# Altium PCB FLX5.PcbDoc (part 3 of 4)
Units mm, origin at the board's own origin, x right, y up, seen from the top; angles counter-clockwise.
Board outline 45.2 x 54.5 mm, 4 copper layers (Top Layer, gndplane, vplane, Bottom Layer), stack 1.596 mm thick; 151 components, 82 nets, 455 pads, 132 vias.
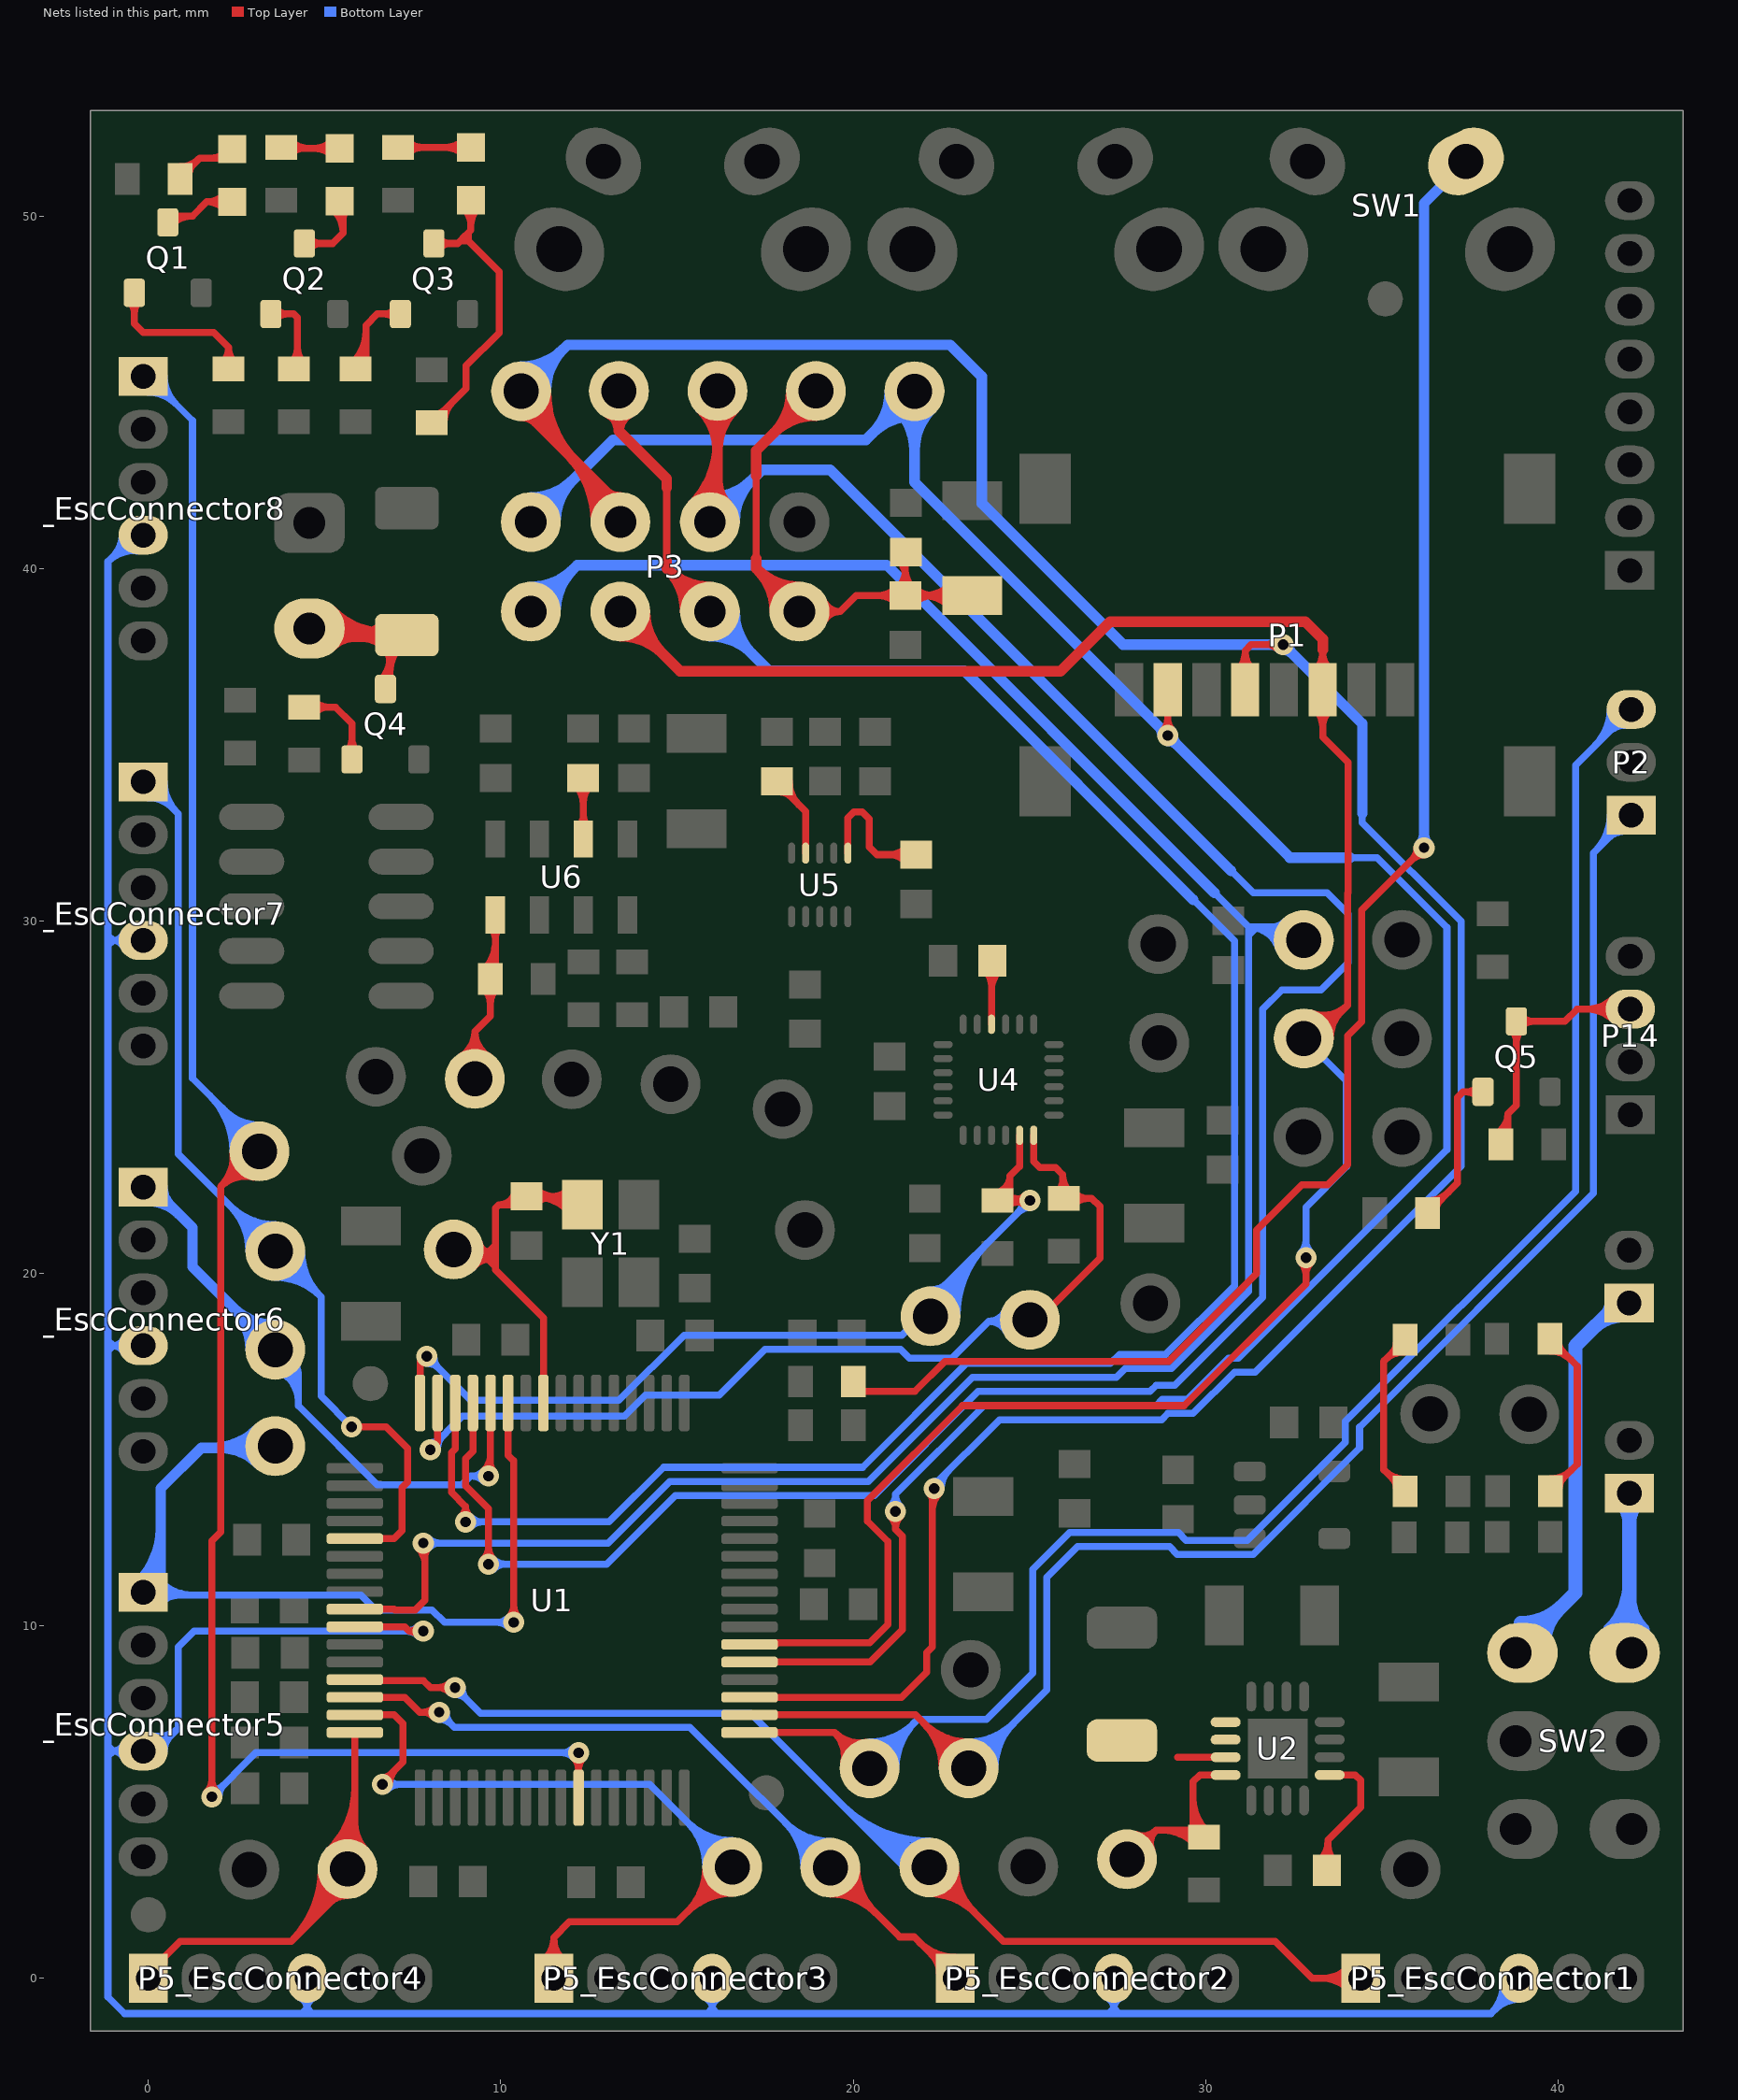
[diagram p5: the nets of this part, all layers, seen from the top]

## Via types
v1: diameter 0.6, hole 0.3, Top Layer to Bottom Layer, 132 vias

## Nets (pads, with @x,y where several pads share a name; then routed paths per layer and width w, separated by ;. In a path a pad name is that pad's centre, name@x,y a point inside that pad or via, vN(x,y) a via of type N, cw(c..) or ccw(c..) an arc to the next point about the centre after c; other vN are vias at no path point) (continued)
NetC18_1: C18.1 OSC1.1 U1.41 Y1.3 | length 16.5
  Top Layer w0.2: 9.6,20.45 9.85,20.2 ; 9.65,20.6 9.85,20.8 ; 10.218,21.948 ccw(c10.218,22.331) C18.1@10.585,22.219 ; C18.1@10.393,22.277 cw(c9.948,22.414) 9.948,21.948 ; C18.1@10.887,22.189 cw(c10.887,20.645) Y1.3@11.98,21.737 ; C18.1@10.992,21.977 cw(c11.505,21.465) 11.505,22.189 cw(c11.505,22.913) C18.1@10.992,22.401 ; U1.41@11.208,16.325 11.208,18.742 9.85,20.1 9.85,20.2 ; 11.37,22.189 cw(c11.37,21.127) Y1.3@12.121,21.878 ; 11.45,22.189 ccw(c11.45,22.938) Y1.3@11.98,22.409 ; Y1.3@12.316,21.948 12.074,22.189 C18.1@10.73,22.189 10.489,21.948 9.948,21.948 ; 9.85,20.2 9.85,20.8 ; 9.85,20.8 9.85,21.85 9.948,21.948
  Top Layer w0.4: OSC1.1@8.6,20.508 9.692,20.508 ; OSC1.1@9.16,20.261 cw(c9.692,19.812) 9.692,20.508 ; OSC1.1@9.297,20.824 ccw(c9.692,20.912) 9.692,20.508
NetC24_1: C24.1 U2.9 | length 5
  Top Layer w0.2: C24.1@33.235,3.326 ccw(c32.645,3.916) 33.479,3.916 ; C24.1@33.479,3.064 33.479,3.929 34.4,4.85 34.4,5.621 34.25,5.771 U2.9@33.521,5.771 ; 33.479,3.76 ccw(c34.093,3.76) C24.1@33.659,3.326
NetC31_2: C31.2 U4.10 | length 2.5
  Top Layer w0.2: C31.2@23.738,28.606 cw(c23.289,28.157) 23.924,28.157 ; U4.10@23.924,27.071 C31.2@23.924,28.463 ; 23.924,28.031 cw(c24.737,28.031) C31.2@24.162,28.606
NetC36_1: C36.1 U5.1 | length 5.1
  Top Layer w0.2: U5.1@19.851,31.925 19.851,32.927 20.024,33.1 20.258,33.1 20.458,32.9 20.458,32.1 20.676,31.882 C36.1@21.783,31.882 ; C36.1@21.521,31.67 ccw(c21.009,31.158) 21.009,31.882 ccw(c21.009,32.606) C36.1@21.521,32.094
NetC37_1: C37.1 U5.4 | length 3.9
  Top Layer w0.2: C37.1@17.833,33.966 17.833,33.925 18.651,33.107 U5.4@18.651,31.925 ; C37.1@17.883,33.666 cw(c17.883,33.162) 18.24,33.518 ; C37.1@17.983,33.966 ccw(c18.445,33.966) C37.1@18.119,33.64 ; C37.1@18.183,33.966 ccw(c19.128,33.966) 18.46,33.298
NetC38_1: C38.1 U6.2 | length 3.5
  Top Layer w0.2: C38.1@12.121,33.847 cw(c11.587,33.313) 12.342,33.313 ; U6.2@12.219,32.696 ccw(c11.92,32.994) 12.342,32.994 ccw(c12.765,32.994) U6.2@12.466,32.696 ; C38.1@12.333,34.059 12.342,34.05 U6.2@12.342,32.322 ; 12.342,33.357 cw(c13.035,33.357) C38.1@12.545,33.847
NetD1_1: D1.1 R8.2 | length 3.2
  Top Layer w0.2: R8.2@0.9,51.4 ccw(c0.9,52.124) 1.412,51.612 ; R8.2@1.05,51.25 1.45,51.65 2.122,51.65 D1.1@2.378,51.906 ; R8.2@1.15,51.15 cw(c1.633,51.15) 1.291,51.491 ; 1.784,51.65 ccw(c1.784,52.224) D1.1@2.29,51.953
NetD1_2: D1.2 Q1.3 | length 4
  Top Layer w0.2: Q1.3@0.55,49.825 0.725,50 1.25,50 1.656,50.406 ; Q1.3@0.691,49.784 cw(c1.214,49.261) 1.214,50 ; Q1.3@0.691,50.066 ccw(c0.852,50.227) 0.852,50 ; D1.2@2.165,50.194 ccw(c1.656,49.687) 1.656,50.406 ; D1.2@2.165,50.618 cw(c1.656,51.125) 1.656,50.406 ; D1.2@2.378,50.406 1.656,50.406
NetD2_1: D2.1 R9.2 | length 3.7
  Top Layer w0.2: R9.2@3.774,51.95 3.799,51.925 D2.1@5.428,51.925 ; R9.2@4.051,51.773 cw(c4.418,51.407) 4.418,51.925 ; R9.2@4.051,52.127 ccw(c4.538,52.614) 4.538,51.925 ; D2.1@5.216,51.713 ccw(c4.704,51.201) 4.704,51.925 ccw(c4.704,52.649) D2.1@5.216,52.137
NetD2_2: D2.2 Q2.3 | length 4.4
  Top Layer w0.2: Q2.3@4.425,49.225 5.227,49.225 5.528,49.526 D2.2@5.528,50.425 ; Q2.3@4.566,49.084 cw(c4.908,48.742) 4.908,49.225 cw(c4.908,49.708) Q2.3@4.566,49.366 ; D2.2@5.226,50.203 cw(c4.605,49.52) 5.528,49.52 ; D2.2@5.361,50.351 cw(c5.016,49.973) 5.528,49.973 ; 5.528,49.942 cw(c5.911,49.942) D2.2@5.64,50.213
NetD3_1: D3.1 R10.2 | length 4.2
  Top Layer w0.2: R10.2@7.081,51.95 D3.1@9.15,51.95 ; R10.2@7.358,51.773 cw(c7.785,51.346) 7.785,51.95 cw(c7.785,52.554) R10.2@7.358,52.127 ; D3.1@8.938,51.738 ccw(c8.426,51.226) 8.426,51.95 ccw(c8.426,52.674) D3.1@8.938,52.162
NetD3_2: D3.2 JP1.1 Q3.3 | length 11.8
  Top Layer w0.2: JP1.1@8.04,44.136 9.016,45.112 9.016,45.753 9.95,46.687 9.95,48.425 9.075,49.3 ; Q3.3@8.1,49.225 8.775,49.225 8.85,49.3 ; JP1.1@8.14,44.386 ccw(c8.14,44.748) 8.396,44.492 ; Q3.3@8.241,49.084 cw(c8.583,48.742) 8.583,49.225 cw(c8.583,49.708) Q3.3@8.241,49.366 ; JP1.1@8.39,44.136 cw(c9.235,44.136) 8.638,44.734 ; D3.2@8.938,50.238 cw(c8.426,49.726) 9.15,49.726 cw(c9.874,49.726) D3.2@9.362,50.238 ; 9.076,49.301 9.076,49.526 ; D3.2@9.15,50.45 9.15,49.6 9.076,49.526 ; 8.85,49.3 8.963,49.413 ; 8.85,49.3 9.075,49.3 ; 8.963,49.413 9.075,49.3 ; 8.963,49.413 9.076,49.526
NetD4_1: D4.1 LS1.2 Q4.3 | length 12.2
  Top Layer w0.2: LS1.2@4.65,38.112 LS1.2@4.657,38.112 ; Q4.3@6.586,36.826 ccw(c5.948,37.464) 6.85,37.464 ; D4.1@6.679,37.759 cw(c6.268,37.347) 6.85,37.347 ; Q4.3@6.727,36.685 ccw(c6.431,36.981) Q4.3@6.85,36.981 ; Q4.3@6.85,36.585 D4.1@6.85,38 ; 6.85,37.024 cw(c8.016,37.024) D4.1@7.234,37.89 ; 6.85,37.475 cw(c7.609,37.475) D4.1@7.1,38.038
  Top Layer w0.4: LS1.2@4.619,38.112 LS1.2@4.65,38.112 ; LS1.2@4.619,38.15 4.657,38.112 D4.1@7.333,38.112 ; LS1.2@4.896,38.477 ccw(c5.777,39.357) 5.777,38.112 ; LS1.2@5.179,37.84 cw(c5.835,37.184) 5.835,38.112 ; LS1.2@5.179,38.76 ccw(c6.742,40.323) D4.1@6.742,38.112 ; D4.1@6.75,37.829 ccw(c6.067,37.146) 6.067,38.112 ccw(c6.067,39.078) D4.1@6.75,38.395
NetDRX_1: DRX.1 P2.3 U1.17 | length 58.6
  Top Layer w0.2: U1.17@17.058,6.975 19.475,6.975 ; DRX.1@19.732,6.111 ccw(c18.805,6.305) 19.475,6.975 ; 19.737,6.713 cw(c19.238,6.214) DRX.1@19.928,6.07 ; 19.749,6.7 ccw(c20.256,7.207) DRX.1@20.375,6.5 ; DRX.1@20.342,6.698 cw(c20.177,7.677) 19.475,6.975 ; DRX.1@20.467,5.983 19.475,6.975
  Bottom Layer w0.2: DRX.1@20.467,5.983 21.834,7.35 23.787,7.35 25.1,8.663 25.1,11.601 26.149,12.65 29.227,12.65 29.448,12.429 31.186,12.429 33.971,15.214 33.971,15.805 40.5,22.335 40.5,34.424 P2.3@42.079,36.004 ; DRX.1@20.467,6.508 ccw(c20.467,7.775) 21.363,6.879 ; DRX.1@20.467,6.708 ccw(c20.467,8.458) 21.704,7.221 ; DRX.1@20.817,5.958 cw(c21.722,5.958) 21.082,6.598 ; DRX.1@21.017,5.958 cw(c22.405,5.958) 21.423,6.94 ; DRX.1@21.217,5.958 cw(c23.088,5.958) 21.765,7.281 ; 41.055,34.98 ccw(c40.031,36.004) P2.3@41.479,36.004 ; 41.397,35.321 ccw(c40.714,36.004) P2.3@41.679,36.004 ; 41.417,35.342 cw(c41.929,34.83) P2.3@41.929,35.554
NetDTX_1: DTX.1 P2.1 U1.18 | length 57.2
  Top Layer w0.2: U1.18@17.058,7.475 21.763,7.475 DTX.1@23.277,5.961 ; DTX.1@22.527,5.961 ccw(c20.716,5.961) 21.997,7.241 ccw(c23.277,8.521) DTX.1@23.277,6.711 ; DTX.1@22.727,5.961 ccw(c21.399,5.961) 22.338,6.9 ccw(c23.277,7.838) DTX.1@23.277,6.511
  Bottom Layer w0.2: DTX.1@23.277,5.961 25.5,8.184 25.5,11.382 26.368,12.25 28.976,12.25 29.197,12.029 31.351,12.029 34.371,15.048 34.371,15.64 41.004,22.273 41.004,31.928 P2.1@42.079,33.004 ; DTX.1@23.277,6.511 ccw(c23.277,7.838) 24.216,6.9 ccw(c25.155,5.961) DTX.1@23.827,5.961 ; DTX.1@23.277,6.711 ccw(c23.277,8.521) 24.557,7.241 ccw(c25.838,5.961) DTX.1@24.027,5.961 ; 41.055,31.98 ccw(c40.031,33.004) P2.1@41.479,33.004 ; 41.397,32.321 ccw(c40.714,33.004) P2.1@41.679,33.004 ; 41.417,32.342 cw(c41.929,31.83) P2.1@41.929,32.554
NetINTa2_1: INTa2.1 JP2.2 U6.5 | length 10.6
  Top Layer w0.2: INTa2.1@8.871,26.161 ccw(c8.439,26.863) 9.263,26.863 ; INTa2.1@8.975,25.991 ccw(c8.659,26.506) 9.263,26.506 ccw(c9.867,26.506) INTa2.1@9.551,25.991 ; INTa2.1@9.263,25.522 9.263,26.863 ; JP2.2@9.526,28.073 cw(c9.099,27.646) 9.703,27.646 cw(c10.306,27.646) JP2.2@9.88,28.073 ; JP2.2@9.526,28.627 ccw(c8.762,29.39) 9.842,29.39 ; INTa2.1@9.656,26.161 cw(c10.087,26.863) 9.263,26.863 ; JP2.2@9.668,28.485 ccw(c9.245,28.908) 9.842,28.908 ; JP2.2@9.703,28.35 9.703,27.303 9.263,26.863 ; U6.5@9.719,29.798 cw(c9.42,29.499) 9.842,29.499 cw(c10.265,29.499) U6.5@9.966,29.798 ; JP2.2@9.842,28.416 U6.5@9.842,30.172
NetL1_1: L1.1 U2.1 U2.2 U2.3 | length 1.4
  Top Layer w0.2: 29.201,6.271 U2.3@30.571,6.271
NetP11_1: P11.1 SW2.C1 | length 15.1
  Bottom Layer w0.4: SW2.C1@38.895,9.333 40.5,10.938 40.5,17.95 41.708,19.158 P11.1@42.021,19.158 ; SW2.C1@38.945,10.083 ccw(c38.945,11.773) 40.14,10.578 ; SW2.C1@39.595,9.433 cw(c41.043,9.433) 40.019,10.457 ; 40.996,18.446 cw(c41.871,17.571) P11.1@41.871,18.808 ; P11.1@41.388,18.838 ccw(c41.069,19.158) P11.1@41.521,19.158
NetP13_1: P13.1 SW2.C2 | length 8.3
  Bottom Layer w0.4: SW2.C2@41.485,9.893 ccw(c40.175,11.203) 42.028,11.203 ; P13.1@41.78,13.517 cw(c41.183,12.92) 42.028,12.92 cw(c42.873,12.92) P13.1@42.275,13.517 ; 42.028,10.802 ccw(c43.313,10.802) SW2.C2@42.404,9.893 ; P13.1@42.028,13.765 42.028,9.5 SW2.C2@42.195,9.333
NetP14_3: P14.3 Q5.3 R19.2 | length 12.4
  Top Layer w0.2: R19.2@38.256,23.976 ccw(c37.944,24.53) 38.58,24.53 ; R19.2@38.354,23.802 ccw(c38.137,24.188) 38.58,24.188 ; R19.2@38.379,23.658 38.58,23.859 38.58,24.53 ; Q5.3@38.682,26.911 cw(c38.34,26.57) 38.823,26.57 cw(c39.306,26.57) Q5.3@38.964,26.911 ; Q5.3@38.964,27.011 cw(c39.306,26.67) 39.306,27.153 cw(c39.306,27.636) Q5.3@38.964,27.294 ; P14.3@41.586,27.182 ccw(c40.818,26.414) 40.818,27.5 ccw(c40.818,28.586) P14.3@41.586,27.818 ; P14.3@41.727,27.323 ccw(c41.3,26.896) 41.3,27.5 ccw(c41.3,28.104) P14.3@41.727,27.677 ; P14.3@42.054,27.5 40.55,27.5 40.203,27.153 Q5.3@38.823,27.153 38.823,24.773 38.58,24.53
NetPG_1: PG.1 R18.2 U2.4 | length 10.3
  Top Layer w0.2: PG.1@27.771,3.378 28.593,4.2 ; PG.1@27.965,3.893 ccw(c28.101,4.253) 28.374,3.981 ccw(c28.646,3.708) PG.1@28.286,3.572 ; PG.1@28.036,4.08 ccw(c28.221,4.572) 28.593,4.2 ; PG.1@28.473,3.643 cw(c28.965,3.828) 28.593,4.2 ; 28.781,4.2 cw(c28.781,2.937) R18.2@29.675,3.83 ; 29.264,4.2 cw(c29.264,3.419) R18.2@29.816,3.971 ; R18.2@29.65,3.8 R18.2@29.65,4.2 ; 29.65,4.614 ccw(c30.458,4.614) R18.2@29.887,4.042 ; 29.65,5.097 ccw(c30.941,5.097) R18.2@30.028,4.184 ; U2.4@30.571,5.771 29.838,5.771 29.65,5.583 R18.2@29.65,4.2 ; 28.593,4.2 R18.2@29.65,4.2
NetQ1_1: Q1.1 R11.1 | length 6.1
  Top Layer w0.2: Q1.1@-0.541,47.584 cw(c-0.883,47.242) -0.4,47.242 cw(c0.083,47.242) Q1.1@-0.259,47.584 ; Q1.1@-0.4,47.825 -0.4,46.95 -0.15,46.7 1.85,46.7 2.275,46.275 R11.1@2.275,45.664 ; R11.1@2.098,45.841 ccw(c1.671,46.267) 2.275,46.267 ccw(c2.879,46.267) R11.1@2.452,45.841
NetQ2_1: Q2.1 R12.1 | length 4
  Top Layer w0.2: Q2.1@3.475,47.225 4.125,47.225 4.228,47.122 R12.1@4.228,45.664 ; Q2.1@3.616,47.084 cw(c3.958,46.742) 3.958,47.225 cw(c3.958,47.708) Q2.1@3.616,47.366 ; R12.1@4.051,45.841 ccw(c3.624,46.267) 4.228,46.267 ccw(c4.832,46.267) R12.1@4.405,45.841
NetQ3_1: Q3.1 R13.1 | length 4.8
  Top Layer w0.2: R13.1@5.798,45.841 ccw(c4.883,46.756) 6.177,46.756 ; R13.1@5.94,45.699 ccw(c5.366,46.273) 6.177,46.273 ; R13.1@5.975,45.664 6.177,45.866 6.177,46.904 6.498,47.225 Q3.1@7.15,47.225 ; Q3.1@7.009,47.084 ccw(c6.667,46.742) 6.667,47.225 ccw(c6.667,47.708) Q3.1@7.009,47.366
NetQ4_1: Q4.1 R14.1 | length 4.3
  Top Layer w0.2: R14.1@4.416,36.071 5.307,36.071 5.777,35.601 Q4.1@5.777,34.585 ; R14.1@4.692,35.894 cw(c5.119,35.467) 5.119,36.071 cw(c5.119,36.674) R14.1@4.692,36.247 ; Q4.1@5.636,34.826 ccw(c5.294,35.168) 5.777,35.168 ccw(c6.26,35.168) Q4.1@5.919,34.826
NetQ5_1: Q5.1 R20.1 | length 6.1
  Top Layer w0.2: R20.1@36.302,21.712 37.152,22.563 37.152,25 37.304,25.153 Q5.1@37.873,25.153 ; R20.1@36.302,22.062 ccw(c36.302,22.903) 36.896,22.308 ; R20.1@36.552,21.812 cw(c36.918,21.812) 36.659,22.07 ; Q5.1@37.732,25.011 ccw(c37.39,24.67) 37.39,25.153 ccw(c37.39,25.636) Q5.1@37.732,25.294
NetR4_2: R4.2 R6.1 | length 6.7
  Top Layer w0.2: 35.069,14.415 ccw(c35.667,15.012) R4.2@35.667,14.167 ; 35.069,17.527 cw(c35.667,16.93) R6.1@35.667,17.775 ; 35.311,14.173 cw(c35.055,13.917) R4.2@35.417,13.917 ; 35.311,17.769 ccw(c35.055,18.025) R6.1@35.417,18.025 ; R4.2@35.667,13.817 35.05,14.434 35.05,17.508 R6.1@35.667,18.125
NetR5_2: R5.2 R7.1 | length 6.9
  Top Layer w0.2: R7.1@39.77,17.8 cw(c39.77,16.955) 40.367,17.553 ; R7.1@39.77,18.15 40.55,17.37 40.55,14.584 R5.2@39.791,13.825 ; R5.2@39.791,14.175 ccw(c39.791,15.02) 40.389,14.422 ; R7.1@40.02,18.05 ccw(c40.382,18.05) 40.126,17.794 ; R5.2@40.041,13.925 cw(c40.403,13.925) 40.147,14.181
NetR17_2: R17.2 SW1.1 | length 48.7
  Top Layer w0.2: R17.2@20.009,16.933 20.291,16.65 21.748,16.65 22.598,17.5 28.95,17.5 31.45,20 31.45,21.231 32.73,22.512 33.462,22.512 34.03,23.08 34.03,26.748 34.428,27.146 34.428,30.307 v1(36.2,32.079) ; v1@36,32.079 cw(c35.517,32.079) 35.859,31.738 cw(c36.2,31.396) v1@36.2,31.879
  Bottom Layer w0.3: v1@36.094,32.185 ccw(c35.838,32.441) 36.2,32.441 ccw(c36.562,32.441) v1@36.306,32.185 ; v1(36.2,32.079) 36.2,50.363 SW1.1@37.391,51.554
NetR23_2: R23.2 SCLi.1 U1.47 U4.24 | length 32.2
  Top Layer w0.2: v1(8,15) 8.208,15.208 U1.47@8.208,16.325 ; SCLi.1@25.024,18.644 25.215,18.644 27,20.428 27,21.9 26.772,22.128 R23.2@25.975,22.128 ; U4.24@25.124,23.921 25.124,23.176 25.3,23 25.75,23 25.95,22.8 R23.2@25.95,22.128 ; R23.2@25.798,22.304 ccw(c25.432,22.671) 25.95,22.671 ; 25.95,22.792 ccw(c26.639,22.792) R23.2@26.152,22.304 ; R23.2@26.252,21.951 cw(c26.679,21.524) 26.679,22.128 cw(c26.679,22.731) R23.2@26.252,22.304
  Bottom Layer w0.2: v1(8,15) 8,15.04 8.91,15.95 13.507,15.95 14.107,16.55 16.2,16.55 17.5,17.85 21.35,17.85 21.6,17.6 22.803,17.6 23.846,18.644 ; v1@8,15.2 ccw(c8,15.585) 8.272,15.313 ; v1@8.2,15 cw(c8.78,15) 8.37,15.41 ; 24.141,18.644 ccw(c24.141,19.034) SCLi.1@24.504,18.889 ; SCLi.1@24.319,18.964 cw(c23.846,19.152) 23.846,18.644 ; SCLi.1@24.35,18.338 ccw(c23.846,18.075) 23.846,18.644 ; SCLi.1@25.024,18.644 23.846,18.644
NetR24_2: R24.2 SDAi.1 U1.48 U4.23 | length 37.2
  Top Layer w0.2: U1.48@7.708,16.325 7.708,17.508 7.85,17.65 v1(7.9,17.65) ; R24.2@24.099,22.071 v1(25.021,22.071) ; R24.2@24.12,22.308 ccw(c23.968,22.765) 24.45,22.765 ; R24.2@24.183,22.118 ccw(c24.06,22.488) 24.45,22.488 ; R24.2@24.376,21.894 cw(c24.802,21.467) 24.802,22.071 cw(c24.802,22.674) R24.2@24.376,22.247 ; R24.2@24.399,22.171 24.45,22.222 24.45,22.765 ; 24.595,22.015 cw(c24.668,21.744) v1@24.874,21.935 ; 24.595,22.126 ccw(c24.668,22.397) v1@24.874,22.206 ; 24.671,22.035 ccw(c24.596,22.316) v1@24.847,22.171 ; 24.671,22.106 cw(c24.596,21.825) v1@24.847,21.971 ; U4.23@24.724,23.921 24.724,23.039 24.45,22.765 ; v1@24.879,21.929 ccw(c24.538,21.588) 24.538,22.071 ccw(c24.538,22.553) v1@24.879,22.212
  Bottom Layer w0.2: v1@7.9,17.45 cw(c7.9,16.967) 8.241,17.308 cw(c8.583,17.65) v1@8.1,17.65 ; v1(7.9,17.65) 9.15,16.4 13.35,16.4 15.2,18.25 21.386,18.25 21.945,18.81 21.945,18.995 v1(25.021,22.071) ; SDAi.1@22.195,19.534 ccw(c22.195,20.23) 22.688,19.738 ; SDAi.1@22.345,18.784 cw(c23.822,18.784) 22.778,19.828 ; SDAi.1@22.545,18.784 cw(c24.505,18.784) 23.119,20.169 ; SDAi.1@22.745,18.784 cw(c25.187,18.784) 23.461,20.511 ; SDAi.1@22.945,18.784 cw(c25.87,18.784) 23.802,20.852 ; v1@24.821,22.071 cw(c24.338,22.071) 24.679,21.729 cw(c25.021,21.388) v1@25.021,21.871
NRF_CE: NCE.1 P3.3 U1.45 | length 84.2
  Top Layer w0.2: U1.45@9.208,16.325 9.208,14.957 9,14.749 9,13.972 9.208,13.764 9.213,13.764 9.65,13.328 v1(9.65,11.75) ; v1@9.509,11.891 ccw(c9.167,12.233) 9.65,12.233 ccw(c10.133,12.233) v1@9.791,11.891 ; P3.3@15.934,41.322 P3.3@16.151,41.539
  Top Layer w0.3: P3.3@15.439,41.817 ccw(c13.72,43.536) 16.151,43.536 ; P3.3@15.651,41.605 ccw(c14.444,42.812) 16.151,42.812 ; NCE.1@15.656,44.546 cw(c14.461,43.351) 16.151,43.351 cw(c17.841,43.351) NCE.1@16.646,44.546 ; NCE.1@15.868,44.758 cw(c15.185,44.075) 16.151,44.075 cw(c17.117,44.075) NCE.1@16.434,44.758 ; P3.3@16.151,41.539 NCE.1@16.151,45.041 ; 16.151,42.488 ccw(c17.1,42.488) P3.3@16.429,41.817
  Bottom Layer w0.2: v1(9.65,11.75) 13.004,11.75 14.954,13.7 20.6,13.7 23.55,16.65 28.424,16.65 28.603,16.829 29.125,16.829 31.62,19.324 31.62,27.5 32.17,28.05 33.282,28.05 34.05,28.818 34.05,30.2 33.45,30.8 31.35,30.8 30.727,31.423 ; v1@9.791,11.609 cw(c10.133,11.267) 10.133,11.75 cw(c10.133,12.233) v1@9.791,11.891
  Bottom Layer w0.3: P3.3@15.934,41.322 17.412,42.8 19.35,42.8 30.727,31.423 ; P3.3@15.934,41.722 ccw(c15.934,42.688) 16.617,42.005 ccw(c17.3,41.322) P3.3@16.334,41.322 ; P3.3@15.934,42.022 ccw(c15.934,43.712) 17.129,42.517 ccw(c18.324,41.322) P3.3@16.634,41.322
NRF_CSN: NCS.1 P3.4 U1.46 | length 75.4
  Top Layer w0.2: U1.46@8.708,16.325 8.708,15.022 8.6,14.914 8.6,13.786 9,13.386 ; v1@8.87,13.102 ccw(c8.625,13.386) 9,13.386 ; v1(9,12.95) 9.025,12.95 9.025,12.975 9.05,13 v1@9.025,13.025 ; v1@9,13.05 9,13.386 ; v1@9.13,13.101 cw(c9.375,13.386) 9,13.386 ; 14.708,40.219 14.708,42.3
  Top Layer w0.3: NCS.1@13.037,44.414 cw(c12.785,43.909) 13.35,43.909 ; NCS.1@13.35,45.041 13.35,43.909 ; NCS.1@13.663,44.414 ccw(c13.915,43.909) 13.35,43.909 ; 14.708,40.219 14.708,40.008 P3.4@15.934,38.782 ; 14.708,42.3 14.708,42.551 13.35,43.909 ; P3.4@15.234,38.782 ccw(c13.544,38.782) 14.739,39.977 ccw(c15.934,41.172) P3.4@15.934,39.482 ; P3.4@15.534,38.782 ccw(c14.568,38.782) 15.251,39.465 ccw(c15.934,40.148) P3.4@15.934,39.182
  Bottom Layer w0.2: v1(9,12.95) 9.025,12.95 9.025,12.975 9.05,13 9,13 8.95,13.05 9.05,13.05 9.15,12.95 13.072,12.95 14.622,14.5 20.268,14.5 23.218,17.45 27.303,17.45 27.557,17.704 28.868,17.704 30.82,19.656 30.82,29.436 29.656,30.6 ; v1@9.141,12.808 cw(c9.483,12.467) 9.483,12.95 cw(c9.483,13.433) v1@9.141,13.091
  Bottom Layer w0.3: P3.4@15.934,38.082 cw(c15.934,36.392) 17.129,37.587 cw(c18.324,38.782) P3.4@16.634,38.782 ; P3.4@15.934,38.382 cw(c15.934,37.416) 16.617,38.099 cw(c17.3,38.782) P3.4@16.334,38.782 ; P3.4@15.934,38.782 17.616,37.1 23.15,37.1 29.65,30.6
NRF_IRQ: NIRQ.1 P3.8 U1.57 | length 77
  Top Layer w0.2: U1.57@5.858,10.475 6.977,10.475 7.001,10.45 7.574,10.45 7.851,10.728 v1@7.851,12.35 ; v1@7.658,12.208 cw(c7.193,11.743) 7.851,11.743 ; 7.851,11.991 cw(c8.158,11.991) v1@7.941,12.208
  Bottom Layer w0.2: v1(7.8,12.35) 7.85,12.3 7.9,12.35 7.9,12.451 8.001,12.35 9.248,12.35 13.038,12.35 14.788,14.1 20.434,14.1 23.384,17.05 27.469,17.05 27.722,17.304 29.034,17.304 31.22,19.49 31.22,29.6 ; v1@7.941,12.208 cw(c8.283,11.867) 8.283,12.35 cw(c8.283,12.833) v1@7.941,12.491 ; 30.25,30.8 31.22,29.83 ; 31.45,29.822 31.442,29.822 31.22,29.6 ; 31.499,29.83 cw(c31.499,29.021) NIRQ.1@32.265,29.281 ; 31.778,29.83 cw(c31.778,29.116) NIRQ.1@32.454,29.346 ; 31.873,29.83 ccw(c31.873,30.371) NIRQ.1@32.255,29.988 ; NIRQ.1@32.076,29.217 ccw(c31.22,28.926) 31.22,29.83 ; NIRQ.1@32.786,29.458 32.414,29.83 31.22,29.83 ; 31.22,29.6 31.22,29.83
  Bottom Layer w0.3: P3.8@10.854,38.782 12.172,40.1 20.95,40.1 30.25,30.8 ; P3.8@10.854,39.182 ccw(c10.854,40.148) 11.537,39.465 ccw(c12.22,38.782) P3.8@11.254,38.782 ; P3.8@10.854,39.482 ccw(c10.854,41.172) 12.049,39.977 ccw(c13.244,38.782) P3.8@11.554,38.782
NRF_MISO: AMISO.1 P1.7 P3.7 U1.21 | length 87.2
  Top Layer w0.2: U1.21@17.058,8.975 20.487,8.975 21.4,9.887 21.4,12.541 21.2,12.741 v1(21.2,13.247) ; v1@21.059,13.105 cw(c20.717,12.764) 21.2,12.764 cw(c21.683,12.764) v1@21.341,13.105 ; v1@28.785,35.406 ccw(c28.444,35.747) 28.927,35.747 ccw(c29.409,35.747) v1@29.068,35.406 ; v1(28.927,35.264) P1.7@28.927,36.563
  Bottom Layer w0.2: v1@21.059,13.388 ccw(c20.717,13.73) 21.2,13.73 ccw(c21.683,13.73) v1@21.341,13.388 ; v1(21.2,13.247) 21.2,13.735 23.715,16.25 28.59,16.25 28.769,16.429 29.483,16.429 30.654,17.6 30.935,17.6 36.85,23.515 36.85,29.822 34.872,31.8 34.1,31.8
  Bottom Layer w0.3: P3.7@10.854,41.322 13.182,43.65 20.359,43.65 AMISO.1@21.741,45.032 21.741,42.45 v1(28.927,35.264) 32.391,31.8 34.1,31.8 ; P3.7@10.854,41.722 ccw(c10.854,42.688) 11.537,42.005 ccw(c12.22,41.322) P3.7@11.254,41.322 ; P3.7@10.854,42.022 ccw(c10.854,43.712) 12.049,42.517 ccw(c13.244,41.322) P3.7@11.554,41.322 ; AMISO.1@21.041,45.032 cw(c19.351,45.032) 20.546,43.837 cw(c21.741,42.642) AMISO.1@21.741,44.332 ; AMISO.1@21.246,44.537 cw(c20.051,43.342) 21.741,43.342 cw(c23.431,43.342) AMISO.1@22.236,44.537 ; AMISO.1@21.341,45.032 cw(c20.375,45.032) 21.058,44.349 cw(c21.741,43.666) AMISO.1@21.741,44.632 ; AMISO.1@21.458,44.749 cw(c20.775,44.066) 21.741,44.066 cw(c22.706,44.066) AMISO.1@22.024,44.749 ; v1@28.777,35.264 ccw(c28.414,35.264) 28.671,35.521 ccw(c28.927,35.777) v1@28.927,35.414 ; v1@28.927,35.114 cw(c28.927,34.752) 29.183,35.008 cw(c29.439,35.264) v1@29.077,35.264
NRF_MOSI: AMOSI.1 P1.3 P3.6 U1.22 | length 76.5
  Top Layer w0.2: U1.22@17.058,9.475 17.108,9.525 20.472,9.525 20.984,10.037 20.984,12.392 20.4,12.975 20.4,13.549 23.101,16.25 29.397,16.25 32.85,19.703 v1(32.85,20.45) ; U1.22@17.744,9.439 cw(c17.95,9.233) 17.95,9.525 ; v1@32.709,20.309 cw(c32.367,19.967) 32.85,19.967 cw(c33.333,19.967) v1@32.991,20.309 ; AMOSI.1@32.788,26.369 34.028,27.609 ; AMOSI.1@32.901,27 ccw(c33.113,27.617) 33.575,27.156 ; AMOSI.1@32.966,27.189 ccw(c33.229,27.955) 33.802,27.382 ; AMOSI.1@33.031,27.378 ccw(c33.345,28.293) 34.028,27.609 ; P1.3@33.114,36.001 cw(c32.602,35.489) 33.327,35.489 cw(c34.051,35.489) P1.3@33.539,36.001 ; P1.3@33.114,37.126 ccw(c32.602,37.638) 33.327,37.638 ccw(c34.051,37.638) P1.3@33.539,37.126 ; 33.327,37.7 P1.3@33.327,36.563 33.327,35.223 34.05,34.5 34.05,30.805 34.028,30.783 34.028,27.609 ; AMOSI.1@33.538,26.669 cw(c34.624,26.669) 33.856,27.437
  Top Layer w0.3: P3.6@13.394,38.082 cw(c13.394,36.392) 14.589,37.587 cw(c15.784,38.782) P3.6@14.094,38.782 ; P3.6@13.394,38.382 cw(c13.394,37.416) 14.077,38.099 cw(c14.76,38.782) P3.6@13.794,38.782 ; P3.6@13.394,38.782 15.089,37.087 25.887,37.087 27.293,38.493 32.834,38.493 33.327,38 33.327,37.7
  Bottom Layer w0.2: v1@32.709,20.591 ccw(c32.367,20.933) 32.85,20.933 ccw(c33.333,20.933) v1@32.991,20.591 ; AMOSI.1@32.788,26.669 34,25.456 34,23.031 32.85,21.881 v1(32.85,20.45)
NRF_SCK: ASCK.1 P1.5 P3.5 U1.19 | length 100.7
  Top Layer w0.2: U1.19@17.058,7.975 21.373,7.975 22.087,8.689 22.087,9.238 22.25,9.401 v1@22.25,13.95 ; v1@22.158,13.758 cw(c21.938,13.538) 22.25,13.538 ; 22.25,13.296 cw(c22.903,13.296) v1@22.441,13.758 ; P1.5@30.914,37.126 ccw(c30.402,37.638) 31.127,37.638 ccw(c31.851,37.638) P1.5@31.339,37.126 ; P1.5@31.127,36.563 31.127,37.676 31.293,37.843 v1(32.207,37.843) ; v1@32.066,37.701 ccw(c31.724,37.36) 31.724,37.843 ccw(c31.724,38.325) v1@32.066,37.984
  Top Layer w0.3: ASCK.1@10.578,44.334 cw(c10.578,43.733) 11.003,44.158 ; ASCK.1@10.578,45.034 10.578,44.582 13.394,41.767 P3.5@13.394,41.322 ; ASCK.1@10.678,45.034 ccw(c12.009,45.034) 11.068,44.093 ; ASCK.1@10.978,45.034 ccw(c13.034,45.034) 11.58,43.581 ; ASCK.1@11.278,45.034 ccw(c14.058,45.034) 12.092,43.068 ; 11.884,43.276 cw(c9.93,41.322) P3.5@12.694,41.322 ; 12.397,42.764 cw(c10.954,41.322) P3.5@12.994,41.322 ; 12.909,42.252 cw(c11.978,41.322) P3.5@13.294,41.322 ; 12.959,42.202 ccw(c13.394,42.638) P3.5@13.394,42.022
  Bottom Layer w0.2: v1(22.3,13.9) 22.293,13.893 22.278,13.893 22.25,13.921 22.25,13.95 24.15,15.85 28.756,15.85 28.935,16.029 29.649,16.029 30.82,17.2 31.405,17.2 37.25,23.044 37.25,29.988 34.45,32.788 34.45,33.05 ; v1@22.3,14.1 ccw(c22.3,14.341) 22.471,14.171 ; v1@22.5,13.9 cw(c23.224,13.9) 22.712,14.412
  Bottom Layer w0.3: ASCK.1@10.578,45.034 11.895,46.35 22.75,46.35 23.65,45.45 23.65,41.85 27.657,37.843 v1(32.207,37.843) 34.45,35.6 34.45,33.05 ; ASCK.1@10.578,45.434 ccw(c10.578,46.399) 11.261,45.717 ccw(c11.944,45.034) ASCK.1@10.978,45.034 ; ASCK.1@10.578,45.734 ccw(c10.578,47.424) 11.773,46.229 ccw(c12.968,45.034) ASCK.1@11.278,45.034 ; v1@32.101,37.737 ccw(c31.845,37.48) 31.845,37.843 ccw(c31.845,38.205) v1@32.101,37.949 ; v1@32.207,37.693 cw(c32.207,37.33) 32.463,37.587 cw(c32.719,37.843) v1@32.357,37.843
NRF_VCC: B1.2 C2.1 C3.1 NRFV.1 P3.2 | length 29.9
  Top Layer w0.2: 17.25,40.286 17.25,42.639 ; P3.2@18.474,38.782 19.632,38.782 ; P3.2@19.159,38.475 cw(c19.632,38.263) 19.632,38.782 ; P3.2@19.159,39.088 ccw(c19.632,39.301) 19.632,38.782 ; B1.2@21.22,39.025 ccw(c20.708,38.512) 20.708,39.237 ccw(c20.708,39.961) B1.2@21.22,39.449 ; B1.2@21.27,39.449 ccw(c20.758,39.961) 21.483,39.961 ccw(c22.207,39.961) B1.2@21.695,39.449 ; C2.1@21.283,40.253 cw(c20.802,39.772) 21.483,39.772 ; C2.1@21.495,40.466 21.483,40.453 B1.2@21.483,39.237 ; B1.2@21.745,39.025 cw(c22.257,38.512) 22.257,39.237 cw(c22.257,39.961) B1.2@21.745,39.449 ; 21.973,39.237 cw(c21.973,38.123) C3.1@22.76,38.911 ; 22.011,39.237 ccw(c22.011,40.296) C3.1@22.76,39.547 ; 22.456,39.237 cw(c22.456,38.606) C3.1@22.902,39.052 ; 22.494,39.237 ccw(c22.494,39.813) C3.1@22.902,39.406 ; C3.1@23.379,39.229 23.371,39.237 B1.2@21.483,39.237 ; 19.632,38.782 20.087,39.237 B1.2@21.483,39.237
  Top Layer w0.3: 17.25,40.286 17.25,40.006 P3.2@18.474,38.782 ; 17.25,42.639 17.25,43.348 NRFV.1@18.943,45.041 ; P3.2@17.774,38.782 ccw(c16.084,38.782) 17.279,39.977 ccw(c18.474,41.172) P3.2@18.474,39.482 ; P3.2@18.074,38.782 ccw(c17.108,38.782) 17.791,39.465 ccw(c18.474,40.148) P3.2@18.474,39.182 ; NRFV.1@18.243,45.041 cw(c16.553,45.041) 17.748,43.846 cw(c18.943,42.651) NRFV.1@18.943,44.341 ; NRFV.1@18.543,45.041 cw(c17.577,45.041) 18.26,44.358 cw(c18.943,43.675) NRFV.1@18.943,44.641
PD0: ESS_EscConnector1.1 P5_EscConnector1.1 U1.61 | length 51.4
  Top Layer w0.2: U1.61@5.777,8.45 5.802,8.475 U1.61@5.858,8.475 5.883,8.45 7.8,8.45 8,8.25 v1(8.7,8.25) ; U1.61@6.544,8.51 ccw(c6.689,8.655) 6.689,8.45 ; v1@8.559,8.109 ccw(c8.217,7.767) 8.217,8.25 ccw(c8.217,8.733) v1@8.559,8.391 ; ESS_EscConnector1.1@22.162,2.399 cw(c22.162,0.588) 23.442,1.868 cw(c24.723,3.149) ESS_EscConnector1.1@22.912,3.149 ; ESS_EscConnector1.1@22.162,2.599 cw(c22.162,1.271) 23.101,2.21 cw(c24.04,3.149) ESS_EscConnector1.1@22.712,3.149 ; ESS_EscConnector1.1@22.162,3.149 24.261,1.05 31.98,1.05 33.03,0 P5_EscConnector1.1@34.4,0 ; P5_EscConnector1.1@34.082,-0.318 ccw(c33.314,-1.086) 33.314,0 ccw(c33.314,1.086) P5_EscConnector1.1@34.082,0.318 ; P5_EscConnector1.1@34.223,-0.177 ccw(c33.796,-0.604) 33.796,0 ccw(c33.796,0.604) P5_EscConnector1.1@34.223,0.177
  Bottom Layer w0.2: v1@8.7,8.05 cw(c8.7,7.567) 9.041,7.909 cw(c9.383,8.25) v1@8.9,8.25 ; v1(8.7,8.25) 9.425,7.525 17.083,7.525 21.46,3.149 ESS_EscConnector1.1@22.162,3.149 ; 19.682,4.926 ccw(c22.162,7.406) ESS_EscConnector1.1@22.162,3.899 ; 20.024,4.584 ccw(c22.162,6.723) ESS_EscConnector1.1@22.162,3.699 ; 20.365,4.243 ccw(c22.162,6.04) ESS_EscConnector1.1@22.162,3.499 ; 20.707,3.902 ccw(c22.162,5.357) ESS_EscConnector1.1@22.162,3.299 ; 21.048,3.56 ccw(c22.162,4.674) ESS_EscConnector1.1@22.162,3.099
PD1: ESS_EscConnector2.1 P5_EscConnector2.1 U1.62 | length 34.2
  Top Layer w0.2: U1.62@5.858,7.975 7.275,7.975 7.7,7.55 v1(8.251,7.55) ; v1@8.11,7.409 ccw(c7.769,7.067) 7.769,7.55 ccw(c7.769,8.033) v1@8.11,7.691 ; ESS_EscConnector2.1@19.352,2.389 cw(c19.352,0.579) 20.632,1.859 cw(c21.913,3.139) ESS_EscConnector2.1@20.102,3.139 ; ESS_EscConnector2.1@19.352,2.589 cw(c19.352,1.261) 20.291,2.2 cw(c21.23,3.139) ESS_EscConnector2.1@19.902,3.139 ; ESS_EscConnector2.1@19.352,3.139 21.316,1.175 21.725,1.175 P5_EscConnector2.1@22.9,0 ; 21.876,1.024 ccw(c22.9,2.049) P5_EscConnector2.1@22.9,0.6 ; 22.217,0.683 ccw(c22.9,1.366) P5_EscConnector2.1@22.9,0.4 ; 22.238,0.662 cw(c21.726,0.15) P5_EscConnector2.1@22.45,0.15
  Bottom Layer w0.2: v1@8.251,7.35 cw(c8.251,6.867) 8.593,7.209 cw(c8.934,7.55) v1@8.451,7.55 ; v1(8.251,7.55) 8.676,7.125 15.366,7.125 ESS_EscConnector2.1@19.352,3.139 ; ESS_EscConnector2.1@18.602,3.139 ccw(c16.791,3.139) 18.072,4.42 ccw(c19.352,5.7) ESS_EscConnector2.1@19.352,3.889 ; ESS_EscConnector2.1@18.802,3.139 ccw(c17.474,3.139) 18.413,4.078 ccw(c19.352,5.017) ESS_EscConnector2.1@19.352,3.689
PD2: ESS_EscConnector3.1 P5_EscConnector3.1 U1.63 | length 35.1
  Top Layer w0.2: U1.63@5.858,7.475 6.977,7.475 7.225,7.227 7.225,6.139 6.613,5.528 v1(6.641,5.5) ; v1@6.641,5.7 ccw(c6.641,6.049) 6.888,5.802 ; v1@6.841,5.5 cw(c7.457,5.5) 7.022,5.936 ; P5_EscConnector3.1@11.201,0.486 ccw(c10.605,1.154) 11.5,1.154 ; P5_EscConnector3.1@11.334,0.337 ccw(c11.003,0.708) 11.5,0.708 ccw(c11.997,0.708) P5_EscConnector3.1@11.666,0.337 ; P5_EscConnector3.1@11.5,0 11.5,1.154 ; P5_EscConnector3.1@11.799,0.486 cw(c12.395,1.154) 11.5,1.154 ; ESS_EscConnector3.1@15.818,3.158 cw(c14.008,3.158) 15.288,1.878 cw(c16.568,0.598) ESS_EscConnector3.1@16.568,2.408 ; ESS_EscConnector3.1@16.018,3.158 cw(c14.691,3.158) 15.63,2.22 cw(c16.568,1.281) ESS_EscConnector3.1@16.568,2.608 ; ESS_EscConnector3.1@16.568,3.158 15.01,1.6 11.946,1.6 11.5,1.154
  Bottom Layer w0.2: v1(6.641,5.5) 14.227,5.5 ESS_EscConnector3.1@16.568,3.158 ; v1@6.782,5.359 cw(c7.124,5.017) 7.124,5.5 cw(c7.124,5.983) v1@6.782,5.641 ; ESS_EscConnector3.1@15.818,3.158 ccw(c14.008,3.158) 15.288,4.439 ccw(c16.568,5.719) ESS_EscConnector3.1@16.568,3.908 ; ESS_EscConnector3.1@16.018,3.158 ccw(c14.691,3.158) 15.63,4.097 ccw(c16.568,5.036) ESS_EscConnector3.1@16.568,3.708
PD3: ESS_EscConnector4.1 P5_EscConnector4.1 U1.64 | length 25.6
  Top Layer w0.2: P5_EscConnector4.1@0,0 0.45,0.45 0.45,0.6 0.9,1.05 4.05,1.05 5.858,2.858 U1.64@5.858,6.975 ; 4.051,1.051 ccw(c2.002,3.1) ESS_EscConnector4.1@4.9,3.1 ; 4.393,1.393 ccw(c2.685,3.1) ESS_EscConnector4.1@5.1,3.1 ; 4.734,1.734 ccw(c3.368,3.1) ESS_EscConnector4.1@5.3,3.1 ; 5.076,2.076 ccw(c4.051,3.1) ESS_EscConnector4.1@5.5,3.1 ; ESS_EscConnector4.1@5.12,3.631 ccw(c3.337,5.414) 5.858,5.414 ; 5.138,2.138 cw(c5.65,1.627) ESS_EscConnector4.1@5.65,2.35 ; ESS_EscConnector4.1@5.261,3.489 ccw(c3.82,4.931) 5.858,4.931 ; ESS_EscConnector4.1@5.403,3.348 ccw(c4.302,4.448) 5.858,4.448 ; ESS_EscConnector4.1@5.544,3.206 ccw(c4.785,3.965) 5.858,3.965 ; 5.858,3.925 ccw(c6.475,3.925) ESS_EscConnector4.1@6.039,3.489 ; 5.858,4.408 ccw(c6.958,4.408) ESS_EscConnector4.1@6.18,3.631
PD4: ESS_EscConnector5.1 P5_EscConnector5.1 U1.43 | length 34.3
  Top Layer w0.2: U1.43@10.208,16.325 10.208,14.843 10.366,14.685 v1(10.366,10.1) ; v1@10.225,10.241 ccw(c9.883,10.583) 10.366,10.583 ccw(c10.849,10.583) v1@10.508,10.241
  Bottom Layer w0.2: P5_EscConnector5.1@-0.15,10.95 -0.075,10.875 6.025,10.875 6.45,10.45 8.048,10.45 8.398,10.1 v1(10.366,10.1) ; P5_EscConnector5.1@0.177,11.127 ccw(c0.784,11.734) 0.784,10.875 ; P5_EscConnector5.1@0.318,10.632 cw(c0.906,10.044) 0.906,10.875 ; P5_EscConnector5.1@0.318,11.268 ccw(c1.267,12.217) 1.267,10.875 ; ESS_EscConnector5.1@3.25,15.05 ESS_EscConnector5.1@3.548,15.05 ; v1@10.225,9.959 ccw(c9.883,9.617) 9.883,10.1 ccw(c9.883,10.583) v1@10.225,10.241
  Bottom Layer w0.3: P5_EscConnector5.1@-0.283,11.233 ccw(c-1.811,12.761) 0.35,12.761 ; P5_EscConnector5.1@-0.15,10.95 0.35,11.45 0.35,13.9 1.5,15.05 ESS_EscConnector5.1@3.25,15.05 ; P5_EscConnector5.1@-0.071,11.021 ccw(c-1.086,12.036) 0.35,12.036 ; 1.789,15.05 ccw(c1.789,16.911) ESS_EscConnector5.1@3.105,15.595 ; 2.031,15.05 cw(c2.031,13.531) ESS_EscConnector5.1@3.105,14.605 ; 2.514,15.05 ccw(c2.514,16.186) ESS_EscConnector5.1@3.317,15.383
PD5: ESS_EscConnector6.1 P5_EscConnector6.1 U1.44 | length 28.7
  Top Layer w0.2: v1@9.508,14.391 ccw(c9.026,14.873) 9.708,14.873 ; v1@9.708,14.25 U1.44@9.708,16.325 ; 9.708,14.592 ccw(c9.992,14.592) v1@9.791,14.391
  Bottom Layer w0.2: ESS_EscConnector6.1@3.49,17.297 cw(c3.301,16.367) 4.25,16.367 ; ESS_EscConnector6.1@3.53,17.493 cw(c3.351,16.612) 4.25,16.612 ; ESS_EscConnector6.1@3.57,17.689 cw(c3.401,16.857) 4.25,16.857 ; ESS_EscConnector6.1@3.6,17.836 4.25,17.186 4.25,16.25 6.5,14 8.9,14 9.15,14.25 v1(9.65,14.25) ; ESS_EscConnector6.1@3.61,17.885 cw(c3.45,17.101) 4.25,17.101 ; v1@9.508,14.108 ccw(c9.167,13.767) 9.167,14.25 ccw(c9.167,14.733) v1@9.508,14.391
  Bottom Layer w0.3: P5_EscConnector6.1@-0.15,22.45 0.1,22.45 1.25,21.3 1.25,20.186 ESS_EscConnector6.1@3.6,17.836 ; P5_EscConnector6.1@0,22.05 cw(c0,20.843) 0.854,21.696 ; P5_EscConnector6.1@0.4,22.45 ccw(c1.124,22.45) 0.612,21.938 ; ESS_EscConnector6.1@2.9,17.836 ccw(c1.21,17.836) 2.405,19.031 ccw(c3.6,20.226) ESS_EscConnector6.1@3.6,18.536 ; ESS_EscConnector6.1@3.2,17.836 ccw(c2.234,17.836) 2.917,18.519 ccw(c3.6,19.201) ESS_EscConnector6.1@3.6,18.236
PD6: ESS_EscConnector7.1 P5_EscConnector7.1 U1.53 | length 38.1
  Top Layer w0.2: v1(5.766,15.65) 6.75,15.65 7.358,15.042 7.358,14.079 7.201,13.922 7.201,12.701 6.975,12.475 U1.53@5.858,12.475
  Bottom Layer w0.2: P5_EscConnector7.1@0,33.5 cw(c0,32.567) 0.66,33.227 ; P5_EscConnector7.1@0.25,33.95 ccw(c1.007,33.95) P5_EscConnector7.1@0.472,33.415 ; P5_EscConnector7.1@0.45,33.7 0.45,33.436 0.85,33.036 0.85,23.386 4.9,19.336 4.9,16.516 v1(5.766,15.65) ; P5_EscConnector7.1@0.45,33.95 ccw(c1.69,33.95) 0.813,33.073 ; ESS_EscConnector7.1@2.85,20.636 ccw(c1.039,20.636) 2.32,21.916 ccw(c3.6,23.196) ESS_EscConnector7.1@3.6,21.386 ; ESS_EscConnector7.1@3.05,20.636 ccw(c1.722,20.636) 2.661,21.575 ccw(c3.6,22.514) ESS_EscConnector7.1@3.6,21.186 ; ESS_EscConnector7.1@3.6,19.886 cw(c3.6,18.075) 4.88,19.355 cw(c6.161,20.636) ESS_EscConnector7.1@4.35,20.636 ; ESS_EscConnector7.1@3.6,20.086 cw(c3.6,18.758) 4.539,19.697 cw(c5.478,20.636) ESS_EscConnector7.1@4.15,20.636
PD7: ESS_EscConnector8.1 P5_EscConnector8.1 U1.10 | length 69.8
  Top Layer w0.2: v1@1.659,5.291 ccw(c1.317,5.633) 1.8,5.633 ccw(c2.283,5.633) v1@1.941,5.291 ; v1(1.8,5.15) 1.8,6.35 1.803,6.353 1.803,12.413 2.05,12.659 2.05,22.464 ; 2.05,22.464 ccw(c1.193,23.321) ESS_EscConnector8.1@2.402,23.409 ; 2.306,22.72 cw(c2.855,22.171) ESS_EscConnector8.1@3.028,22.928 ; 2.359,22.773 ccw(c1.769,23.363) ESS_EscConnector8.1@2.601,23.424 ; ESS_EscConnector8.1@2.983,22.733 ccw(c2.76,21.754) 2.05,22.464 ; ESS_EscConnector8.1@3.05,23.464 2.05,22.464 ; v1@12.066,6.259 cw(c11.722,5.915) U1.10@12.208,5.915 ; U1.10@12.208,5.125 12.208,6.401 v1@12.25,6.443 ; U1.10@12.208,5.919 cw(c12.688,5.919) v1@12.349,6.259
  Bottom Layer w0.2: P5_EscConnector8.1@-0.15,45.45 0,45.45 1.25,44.2 1.25,25.54 ESS_EscConnector8.1@3.326,23.464 ; P5_EscConnector8.1@0,45 cw(c0,43.914) 0.768,44.682 cw(c1.536,45.45) P5_EscConnector8.1@0.45,45.45 ; P5_EscConnector8.1@0,45.2 cw(c0,44.596) 0.427,45.023 cw(c0.854,45.45) P5_EscConnector8.1@0.25,45.45 ; 1.745,25.044 cw(c0.165,23.464) ESS_EscConnector8.1@2.4,23.464 ; v1(1.8,5.15) 3.05,6.4 v1(12.207,6.4) ; v1@1.8,5.35 ccw(c1.8,5.833) 2.141,5.491 ccw(c2.483,5.15) v1@2,5.15 ; 2.087,24.703 cw(c0.848,23.464) ESS_EscConnector8.1@2.6,23.464 ; 2.17,24.62 ccw(c3.15,25.6) ESS_EscConnector8.1@3.15,24.214 ; 2.428,24.361 cw(c1.531,23.464) ESS_EscConnector8.1@2.8,23.464 ; 2.511,24.279 ccw(c3.15,24.917) ESS_EscConnector8.1@3.15,24.014 ; v1@12.066,6.259 ccw(c11.724,5.917) 11.724,6.4 ccw(c11.724,6.883) v1@12.066,6.541
SSI2CLK: P5_EscConnector1.4 P5_EscConnector2.4 P5_EscConnector3.4 P5_EscConnector4.4 P5_EscConnector5.4 P5_EscConnector6.4 P5_EscConnector7.4 P5_EscConnector8.4 U1.58 | length 116
  Top Layer w0.2: U1.58@5.858,9.975 7.275,9.975 7.4,9.85 ; v1@7.64,9.73 ccw(c7.4,9.55) 7.4,9.85 ; v1@7.64,9.97 cw(c7.4,10.15) 7.4,9.85 ; v1(7.8,9.85) 7.4,9.85
  Bottom Layer w0.2: -1.15,40.2 cw(c-0.415,39.465) P5_EscConnector8.4@-0.335,40.501 ; -0.997,40.353 ccw(c-1.595,40.95) P5_EscConnector8.4@-0.75,40.95 ; -0.843,40.507 cw(c-0.371,40.035) P5_EscConnector8.4@-0.319,40.701 ; P5_EscConnector5.4@-0.709,6.263 ccw(c-1,6.131) -1,6.45 ; P5_EscConnector5.4@-0.709,6.637 cw(c-1,6.769) -1,6.45 ; P5_EscConnector6.4@-0.709,17.763 ccw(c-1,17.631) -1,17.95 ; P5_EscConnector6.4@-0.709,18.137 cw(c-1,18.269) -1,17.95 ; P5_EscConnector7.4@-0.709,29.263 ccw(c-1,29.131) -1,29.45 ; P5_EscConnector7.4@-0.709,29.637 cw(c-1,29.769) -1,29.45 ; P5_EscConnector6.4@-0.15,17.95 -1,17.95 ; P5_EscConnector7.4@-0.15,29.45 -1,29.45 ; P5_EscConnector8.4@-0.15,40.95 -0.4,40.95 -1.15,40.2 -1.15,29.6 ; P5_EscConnector5.4@0.057,6.693 ccw(c0.19,7.253) 0.596,6.846 ; P5_EscConnector5.4@0.103,6.888 ccw(c0.287,7.663) 0.85,7.1 ; P5_EscConnector5.4@0.45,6.45 cw(c1.054,6.45) 0.627,6.877 ; P5_EscConnector4.4@4.313,-0.559 cw(c4.181,-0.85) 4.5,-0.85 ; P5_EscConnector4.4@4.5,0 4.5,-0.85 ; P5_EscConnector4.4@4.687,-0.559 ccw(c4.819,-0.85) 4.5,-0.85 ; 7.317,9.85 cw(c7.317,9.367) v1@7.658,9.708 ; 7.317,9.85 ccw(c7.317,10.333) v1@7.658,9.991 ; v1(7.8,9.85) 1.3,9.85 0.85,9.4 0.85,7.1 ; P5_EscConnector3.4@15.813,-0.559 cw(c15.681,-0.85) 16,-0.85 ; P5_EscConnector3.4@16,0 16,-0.85 ; P5_EscConnector3.4@16.187,-0.559 ccw(c16.319,-0.85) 16,-0.85 ; P5_EscConnector2.4@27.213,-0.559 cw(c27.081,-0.85) 27.4,-0.85 ; P5_EscConnector2.4@27.4,0 27.4,-0.85 ; P5_EscConnector2.4@27.587,-0.559 ccw(c27.719,-0.85) 27.4,-0.85 ; 38.217,-0.883 cw(c38.9,-1.566) P5_EscConnector1.4@38.9,-0.6 ; 38.44,-0.66 ccw(c37.933,-0.153) P5_EscConnector1.4@38.65,-0.151 ; P5_EscConnector1.4@38.45,-0.151 cw(c37.255,-0.155) 38.1,-1 ; P5_EscConnector1.4@38.9,0 38.9,-0.2 38.1,-1 ; -1.15,6.3 -1,6.45 ; -1.15,6.3 -1.15,-0.524 -0.674,-1 4.35,-1 ; -1.15,6.3 -1.15,6.45 ; -1.15,6.45 -1.15,6.6 ; -1.15,6.45 -1,6.45 ; -1.15,6.6 -1,6.45 ; -1.15,6.6 -1.15,17.8 ; -1.15,17.8 -1.15,17.95 ; -1.15,17.8 -1,17.95 ; -1.15,17.95 -1.15,18.1 ; -1.15,17.95 -1,17.95 ; -1.15,18.1 -1,17.95 ; -1.15,18.1 -1.15,26.802 -1.15,29.3 ; -1.15,29.3 -1,29.45 ; -1.15,29.3 -1.15,29.45 ; -1.15,29.45 -1.15,29.6 ; -1.15,29.45 -1,29.45 ; -1.15,29.6 -1,29.45 ; -1,6.45 P5_EscConnector5.4@-0.15,6.45 0.2,6.45 0.85,7.1 ; 4.35,-1 4.5,-1 ; 4.35,-1 4.5,-0.85 ; 4.5,-1 4.65,-1 ; 4.5,-1 4.5,-0.85 ; 4.5,-0.85 4.65,-1 ; 4.65,-1 15.85,-1 ; 15.85,-1 16,-1 ; 15.85,-1 16,-0.85 ; 16,-1 16.15,-1 ; 16,-1 16,-0.85 ; 16,-0.85 16.15,-1 ; 16.15,-1 27.25,-1 ; 27.25,-1 27.4,-1 ; 27.25,-1 27.4,-0.85 ; 27.4,-1 27.55,-1 ; 27.4,-1 27.4,-0.85 ; 27.4,-0.85 27.55,-1 ; 27.55,-1 38.1,-1